# EAGLE board C1 (EAGLE 7.5.0)
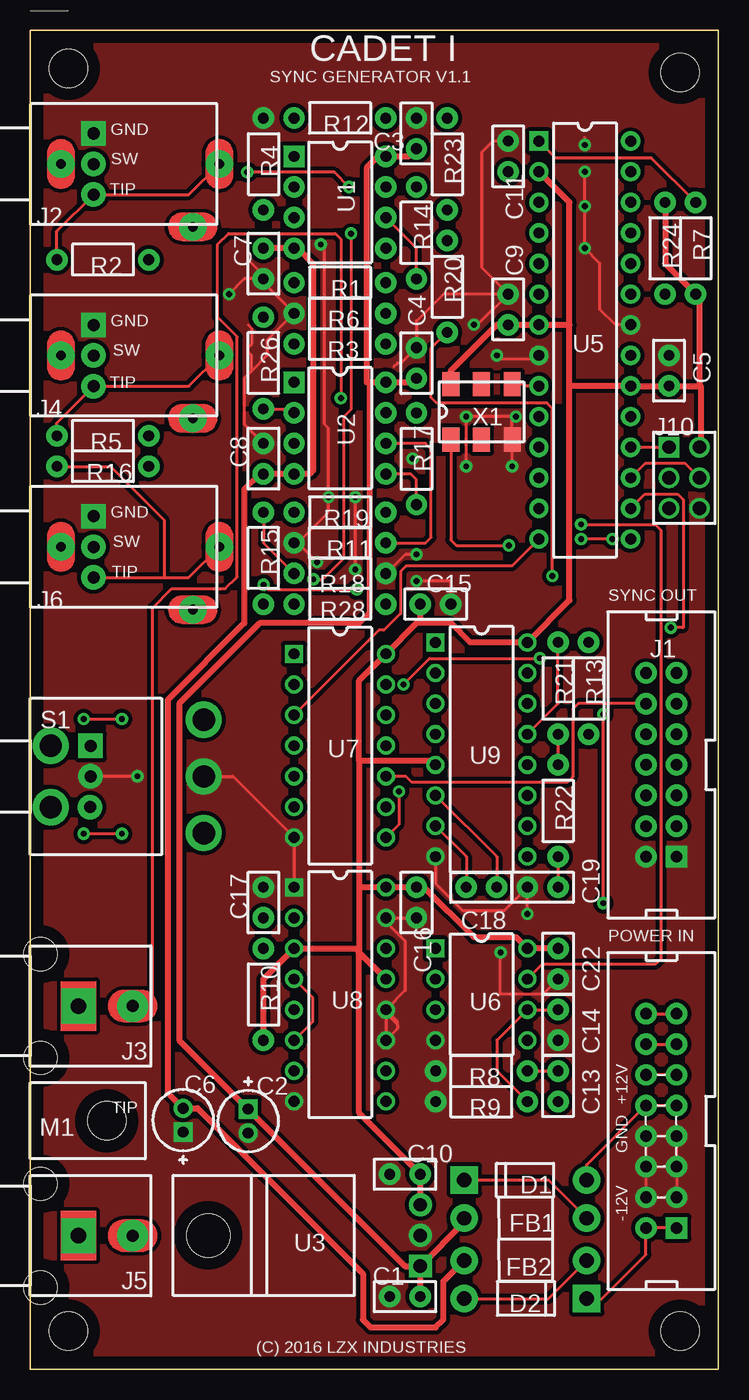
[diagram p0: board, top side]
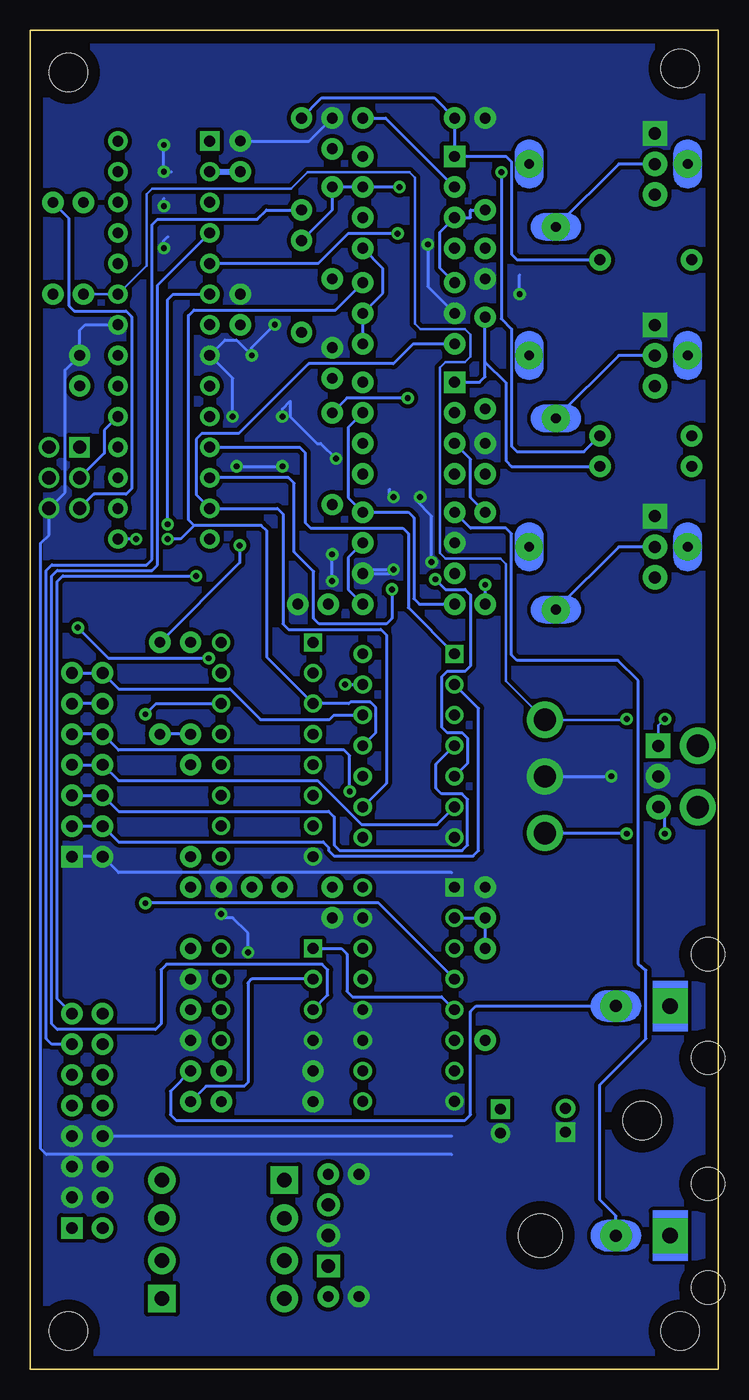
[diagram p1: board, bottom side, seen from below]

Size 57.14 x 111.12 mm. Coordinates in mm from the lower left corner, seen from the top.
Outline: 0,0 57.14,0 57.14,111.12 0,111.12 0,0
Copper layers (1*16): Top 0.035mm / dielectric 1.5mm / Bottom 0.035mm
Design rules "default *": minimum track width 10mil, minimum drill 0.61mm, track to track 8mil, track to pad 8mil, pad to pad 8mil, via to via 8mil, smd to smd 8mil, copper to edge 40mil, drill to drill 8mil, minimum pad ring 0mil, minimum via ring 8mil, stop-mask expansion 2mil, vias tented up to drill 19mil, thermal gap 10mil
Net classes: 1 Power Rails: width 0.508 mm, clearance 0.203 mm, clearance 0.203 mm to class 0
Holes 3.17 mm at 3.17,3.17 3.17,107.95 53.96,3.17 53.96,107.62

## Footprints (pad centres in the part's own frame; a part is rotated, then mirrored left to right if it is on the bottom)
CAP-2.54/6.6x3 = drill 0.889 pad 1.778: 1 -1.27,0; 2 1.27,0
CAPPR-2/5.08 = drill 0.9 pad 1.6 square: 1 -0.991,0 | drill 0.9 pad 1.6: 2 0.991,0
CAP-2.54/6.6x3_C3 = drill 0.889 pad 1.778: 1 -1.27,0; 2 1.27,0
CAP-2.54/6.6x3_C4 = drill 0.889 pad 1.778: 1 -1.27,0; 2 1.27,0
CAP-2.54/6.6x3_C5 = drill 0.889 pad 1.778: 1 -1.27,0; 2 1.27,0
CAPPR-2/5.08_C6 = drill 0.9 pad 1.6 square: 1 -0.991,0 | drill 0.9 pad 1.6: 2 0.991,0
CAP-2.54/6.6x3_C7 = drill 0.889 pad 1.778: 1 -1.27,0; 2 1.27,0
CAP-2.54/6.6x3_C8 = drill 0.889 pad 1.778: 1 -1.27,0; 2 1.27,0
CAP-2.54/6.6x3_C9 = drill 0.889 pad 1.778: 1 -1.27,0; 2 1.27,0
CAP-2.54/6.6x3_C10 = drill 0.889 pad 1.778: 1 -1.27,0; 2 1.27,0
CAP-2.54/6.6x3_C11 = drill 0.889 pad 1.778: 1 -1.27,0; 2 1.27,0
CAP-2.54/6.6x3_C13 = drill 0.889 pad 1.778: 1 -1.27,0; 2 1.27,0
CAP-2.54/6.6x3_C14 = drill 0.889 pad 1.778: 1 -1.27,0; 2 1.27,0
CAP-2.54/6.6x3_C16 = drill 0.889 pad 1.778: 1 -1.27,0; 2 1.27,0
CAP-2.54/6.6x3_C17 = drill 0.889 pad 1.778: 1 -1.27,0; 2 1.27,0
CAP-2.54/6.6x3_C18 = drill 0.889 pad 1.778: 1 -1.27,0; 2 1.27,0
CAP-2.54/6.6x3_C19 = drill 0.889 pad 1.778: 1 -1.27,0; 2 1.27,0
DO-41 = drill 1.2 pad 2.286 square: 1 -5.08,0 | drill 1.2 pad 2.286: 2 5.08,0
DO-41_D2 = drill 1.2 pad 2.286 square: 1 -5.08,0 | drill 1.2 pad 2.286: 2 5.08,0
FB-10.16/4.45x3.5 = drill 1.194 pad 2.286: 1 -5.08,0; 2 5.08,0
IDC14M = drill 0.965 pad 1.778 square: 1 7.62,1.27 | drill 0.965 pad 1.778: 2 7.62,-1.27; 3 5.08,1.27; 4 5.08,-1.27; 5 2.54,1.27; 6 2.54,-1.27; 7 0,1.27; 8 0,-1.27; 9 -2.54,1.27; 10 -2.54,-1.27; 11 -5.08,1.27; 12 -5.08,-1.27; 13 -7.62,1.27; 14 -7.62,-1.27
PJ302M = drill 0.8 pad 2.286: 1A 2.54,0; 2A 13.487,-5.207; 3A 15.697,0 | drill 1 pad 2.032 square: 1B 5.258,2.54 | drill 1 pad 2.032: 2B 5.258,0; 3B 5.258,-2.54
RCJ-04X = drill 1.3 pad 2.9 square: 1 0,4 | drill 1 pad 2.6: 2 0,8.5 | hole 2.75: 4.3,0.85; -4.3,0.85
IDC16M = drill 0.965 pad 1.778 square: 1 8.89,1.27 | drill 0.965 pad 1.778: 2 8.89,-1.27; 3 6.35,1.27; 4 6.35,-1.27; 5 3.81,1.27; 6 3.81,-1.27; 7 1.27,1.27; 8 1.27,-1.27; 9 -1.27,1.27; 10 -1.27,-1.27; 11 -3.81,1.27; 12 -3.81,-1.27; 13 -6.35,1.27; 14 -6.35,-1.27; 15 -8.89,1.27; 16 -8.89,-1.27
HDR-2x3T/2.54x2.54/8x5 = drill 1.1 pad 1.7 square: 1 -2.54,-1.27 | drill 1.1 pad 1.7: 2 -2.54,1.27; 3 0,-1.27; 4 0,1.27; 5 2.54,-1.27; 6 2.54,1.27
KEYSTONE621 = hole 3.175: 0,6.35
RES-7.62/5.1x2.5 = drill 0.889 pad 1.778: 1 -3.81,0; 2 3.81,0
RES-7.62/5.1x2.5_R3 = drill 0.889 pad 1.778: 1 -3.81,0; 2 3.81,0
10TF230-DIY = drill 1.85 pad 3: 1 -4.7,14.4; 2 0,14.4; 3 4.7,14.4; A -2.55,1.7; B 2.55,1.7 | drill 1 pad 2.032 square: 1B -2.54,5 | drill 1 pad 2.032: 2B 0,5; 3B 2.54,4.964
DIP-8 = drill 0.9 pad 1.778 square: 1 -3.81,3.81 | drill 0.9 pad 1.778: 2 -3.81,1.27; 3 -3.81,-1.27; 4 -3.81,-3.81; 5 3.81,-3.81; 6 3.81,-1.27; 7 3.81,1.27; 8 3.81,3.81
TO-220H = drill 1.1 pad 1.9 square: 1 -2.54,0 | drill 1.1 pad 1.9: 2 0,0; 3 2.54,0 | hole 3.6: 0,17.6
DIP-28 = drill 0.9 pad 1.6 square: 1 -3.81,16.51 | drill 0.9 pad 1.6: 2 -3.81,13.97; 3 -3.81,11.43; 4 -3.81,8.89; 5 -3.81,6.35; 6 -3.81,3.81; 7 -3.81,1.27; 8 -3.81,-1.27; 9 -3.81,-3.81; 10 -3.81,-6.35; 11 -3.81,-8.89; 12 -3.81,-11.43; 13 -3.81,-13.97; 14 -3.81,-16.51; 15 3.81,-16.51; 16 3.81,-13.97; 17 3.81,-11.43; 18 3.81,-8.89; 19 3.81,-6.35; 20 3.81,-3.81; 21 3.81,-1.27; 22 3.81,1.27; 23 3.81,3.81; 24 3.81,6.35; 25 3.81,8.89; 26 3.81,11.43; 27 3.81,13.97; 28 3.81,16.51
DIP-8_U6 = drill 0.9 pad 1.5 square: 1 -3.81,3.81 | drill 0.9 pad 1.5: 2 -3.81,1.27; 3 -3.81,-1.27; 4 -3.81,-3.81; 5 3.81,-3.81; 6 3.81,-1.27; 7 3.81,1.27; 8 3.81,3.81
DIP-14 = drill 0.9 pad 1.5 square: 1 -3.81,7.62 | drill 0.9 pad 1.5: 2 -3.81,5.08; 3 -3.81,2.54; 4 -3.81,0; 5 -3.81,-2.54; 6 -3.81,-5.08; 7 -3.81,-7.62; 8 3.81,-7.62; 9 3.81,-5.08; 10 3.81,-2.54; 11 3.81,0; 12 3.81,2.54; 13 3.81,5.08; 14 3.81,7.62
DIP-16 = drill 0.9 pad 1.5 square: 1 -3.81,8.89 | drill 0.9 pad 1.5: 2 -3.81,6.35; 3 -3.81,3.81; 4 -3.81,1.27; 5 -3.81,-1.27; 6 -3.81,-3.81; 7 -3.81,-6.35; 8 -3.81,-8.89; 9 3.81,-8.89; 10 3.81,-6.35; 11 3.81,-3.81; 12 3.81,-1.27; 13 3.81,1.27; 14 3.81,3.81; 15 3.81,6.35; 16 3.81,8.89
CSX-750V = smd 1.4 x 2: 1 -2.54,-2.3; 2 0,-2.3; 3 2.54,-2.3; 4 2.54,2.3; 5 0,2.3; 6 -2.54,2.3

## Placement (x,y rotation side)
C1  330n  [CAP-2.54/6.6x3]  31.11,6.03 180 top
C2  10u 25V  [CAPPR-2/5.08]  18.1,20.6 270 top
C3  100n  [CAP-2.54/6.6x3_C3]  32.07,102.55 90 top
C4  100n  [CAP-2.54/6.6x3_C4]  32.07,83.5 90 top
C5  100n  [CAP-2.54/6.6x3_C5]  53.02,82.87 90 top
C6  10u 25V  [CAPPR-2/5.08_C6]  12.7,20.68 90 top
C7  100n  [CAP-2.54/6.6x3_C7]  19.37,91.76 90 top
C8  100n  [CAP-2.54/6.6x3_C8]  19.37,75.56 270 top
C9  100n  [CAP-2.54/6.6x3_C9]  39.69,87.95 90 top
C10  100n  [CAP-2.54/6.6x3_C10]  31.11,16.19 180 top
C11  100n  [CAP-2.54/6.6x3_C11]  39.69,100.65 90 top
C13  100n  [CAP-2.54/6.6x3_C13]  43.81,23.49 270 top
C14  100n  [CAP-2.54/6.6x3_C14]  43.81,28.57 90 top
C15  100n  [CAP-2.54/6.6x3_C7]  33.66,63.5 0 top
C16  100n  [CAP-2.54/6.6x3_C16]  32.07,38.73 270 top
C17  1n  [CAP-2.54/6.6x3_C17]  19.37,38.73 90 top
C18  47p  [CAP-2.54/6.6x3_C18]  37.47,40 180 top
C19  1n  [CAP-2.54/6.6x3_C19]  42.55,40 180 top
C22  100n  [CAP-2.54/6.6x3_C18]  43.81,33.65 270 top
D1  1N4001  [DO-41]  41.12,15.71 0 top
D2  1N4001  [DO-41_D2]  41.12,5.87 180 top
FB1  68R  [FB-10.16/4.45x3.5]  41.12,12.54 180 top
FB2  68R  [FB-10.16/4.45x3.5]  41.12,9.04 180 top
J1  LZXSYNC14  [IDC14M]  52.39,50.16 270 top
J2  3.5MM JACK  [PJ302M]  0.01,100.01 0 top
J3  RCJ-04X  [RCJ-04X]  0.01,30.15 270 top
J4  3.5MM JACK  [PJ302M]  0.01,84.12 0 top
J5  RCJ-04X  [RCJ-04X]  0.01,11.1 270 top
J6  3.5MM JACK  [PJ302M]  0.01,68.25 0 top
J9  2X8 PIN HEADER  [IDC16M]  52.39,20.62 270 top
J10  2X3 PIN HEADER  [HDR-2x3T/2.54x2.54/8x5]  54.29,73.98 270 top
M1  KEYSTONE621  [KEYSTONE621]  0.01,20.62 270 top
R1  3.92K  [RES-7.62/5.1x2.5]  25.72,90.17 180 top
R2  499R  [RES-7.62/5.1x2.5]  6.03,92.07 180 top
R3  3.92K  [RES-7.62/5.1x2.5_R3]  25.72,85.09 0 top
R4  1K  [RES-7.62/5.1x2.5]  19.37,100.01 270 top
R5  499R  [RES-7.62/5.1x2.5]  6.03,77.47 180 top
R6  1K  [RES-7.62/5.1x2.5_R3]  25.72,87.63 0 top
R7  10K  [RES-7.62/5.1x2.5]  55.24,93.03 270 top
R8  75R  [RES-7.62/5.1x2.5_R3]  37.47,24.76 0 top
R9  680K  [RES-7.62/5.1x2.5_R3]  37.47,22.22 0 top
R10  49.9K  [RES-7.62/5.1x2.5]  19.37,31.11 270 top
R11  1K  [RES-7.62/5.1x2.5_R3]  25.72,68.58 0 top
R12  1K  [RES-7.62/5.1x2.5]  25.72,103.82 180 top
R13  0R  [RES-7.62/5.1x2.5]  46.35,56.51 270 top
R14  1K  [RES-7.62/5.1x2.5_R3]  32.07,94.3 90 top
R15  3.92K  [RES-7.62/5.1x2.5_R3]  19.37,67.31 90 top
R16  499R  [RES-7.62/5.1x2.5]  6.03,74.93 180 top
R17  499R  [RES-7.62/5.1x2.5]  32.07,75.56 270 top
R18  1K  [RES-7.62/5.1x2.5]  25.72,66.04 180 top
R19  75R  [RES-7.62/5.1x2.5]  25.72,71.12 180 top
R20  499R  [RES-7.62/5.1x2.5]  34.61,89.85 270 top
R21  10K  [RES-7.62/5.1x2.5]  43.81,56.51 270 top
R22  10K  [RES-7.62/5.1x2.5]  43.81,46.35 270 top
R23  499R  [RES-7.62/5.1x2.5]  34.61,100.01 270 top
R24  10K  [RES-7.62/5.1x2.5]  52.7,93.03 270 top
R26  1K  [RES-7.62/5.1x2.5_R3]  19.37,83.5 90 top
R28  1K  [RES-7.62/5.1x2.5]  25.72,63.5 180 top
S1  10TF230-DIY  [10TF230-DIY]  0.01,49.2 270 top
U1  LM6172  [DIP-8]  25.72,96.84 0 top
U2  LM6172  [DIP-8]  25.72,78.1 0 top
U3  7805  [TO-220H]  32.38,11.11 90 top
U5  ATMEGA88  [DIP-28]  46.04,85.41 0 top
U6  LM1881  [DIP-8_U6]  37.47,31.11 0 top
U7  74HC14  [DIP-14]  25.72,51.75 0 top
U8  74HC4538  [DIP-16]  25.72,31.11 0 top
U9  74HC4046  [DIP-16]  37.47,51.43 0 top
X1  CSX750VCB13.500M-UT  [CSX-750V]  37.47,79.45 0 top

## Library data of the parts
C1-C11 C13-C19 C22 D1 D2 J1 J3 J5 J9 M1 R1-R24 R26 R28 S1 X1 = common
FB1 FB2 = common; MANUFACTURER: Fair-Rite
J2 J4 J6 = common; DATASHEET: http://www.thonk.co.uk/shop/pj302m/
J10 = common; DATASHEET: http://datasheets.diptrace.com\con_headers\901310126_sd.pdf; MANUFACTURER: Molex
U1 U2 = common; DATASHEET: http://datasheets.diptrace.com\ti\TL07x.pdf; MANUFACTURER: Texas Instruments
U3 U5 = common; MANUFACTURER: Atmel
U6 U7 = common; MANUFACTURER: National Semiconductor
U8 = common; MANUFACTURER: Motorola
U9 = common; DATASHEET: http://datasheets.diptrace.com\fairchild\MM74HC4046.pdf; MANUFACTURER: Fairchild

## Nets
0V: C1.2 C2.2 C3.2 C4.2 C5.2 C6.1 C7.1 C8.1 C9.2 C10.2 C11.2 C14.1 C15.2 C16.2 C17.2 C19.2 C22.2 J1.1 J1.2 J2.1A J2.1B J3.1 J4.1A J4.1B J5.1 J6.1A J6.1B J9.3 J9.4 J9.5 J9.6 J9.7 J9.8 J10.6 R4.1 R6.1 R8.1 R9.1 R11.1 R18.1 S1.2 S1.2B U3.2 U5.8 U5.22 U6.4 U7.7 U8.1 U8.8 U8.11 U8.12 U8.15 U9.8 X1.3
+5V [Power Rails]: C5.1 C9.1 C10.1 C11.1 C15.1 C16.1 C22.1 J10.2 R7.2 R10.2 R24.1 U3.3 U5.2 U5.7 U5.20 U6.8 U7.14 U8.3 U8.13 U8.16 U9.5 U9.16 X1.6
+12V [Power Rails]: C1.1 C2.1 C3.1 C4.1 FB1.2 U1.8 U2.8 U3.1
-12V [Power Rails]: C6.2 C7.2 C8.2 FB2.2 U1.4 U2.4
ATMEGA88_BLANKING_INV: U5.11 U7.1
ATMEGA88_BURSTGATE_INV: U5.5 U7.5
ATMEGA88_CSYNC_INV: U5.16 U7.13
ATMEGA88_HSYNC_INV: R1.1 U5.15 U7.11 U9.3
ATMEGA88_MISO: J10.1 U5.18
ATMEGA88_MOSI: J10.4 U5.17
ATMEGA88_ODDEVEN: R15.1 U5.12
ATMEGA88_ODDEVEN_INV: U5.14 U7.3
ATMEGA88_RESET: J10.5 R7.1 U5.1
ATMEGA88_SCK: J10.3 U5.19
ATMEGA88_VSYNC_INV: R3.1 U5.13 U7.9
CLOCK_OUT: U5.9 X1.4
HSYNC_BUS_OUT: J9.13 J9.14 R23.2
LM1881_CSYNC: U6.1 U8.5
LM1881_ODDEVEN: U5.6 U6.7
LM1881_VSYNC: U5.4 U6.3
Net_0: J5.2 R19.2
Net_1: D2.2 FB2.1
Net_2: D1.1 FB1.1
Net_3: R14.1 U1.6
Net_4: C13.2 U6.2
Net_5: D2.1 J9.1 J9.2
Net_6: R3.2 R6.2 U1.5
Net_7: J4.3A J4.3B R5.2
Net_8: J2.2A J2.2B
Net_9: R1.2 R4.2 U1.3
Net_10: J9.11 J9.12
Net_11: J2.3A J2.3B R2.2
Net_12: R5.1 R14.2 R20.1 U1.7
Net_14: R11.2 R28.1 U2.6
Net_15: J1.3 J1.4 U7.2
Net_16: J1.5 J1.6 U7.4
Net_19: R15.2 R18.2 U2.3
Net_20: J6.3A J6.3B R16.2
Net_21: R26.1 U2.2
Net_22: R16.1 R26.2 U2.1
Net_24: R17.2 U2.5
Net_27: R19.1 R28.2 U2.7
Net_33: D1.2 J9.9 J9.10
Net_34: C13.1 J3.2 R8.2 R17.1
Net_35: C14.2 R9.2 U6.6
Net_40: U8.4 U8.6 U9.14
Net_41: C17.1 R10.1 U8.2
Net_42: C18.1 U9.6
Net_43: C18.2 U9.7
Net_44: C19.1 R22.2
Net_45: R13.2 R21.2 R22.1
Net_46: R21.1 U9.13
Net_47: J1.7 J1.8 U7.6
Net_48: J1.9 J1.10 U7.8
Net_49: J1.11 J1.12 U7.10
Net_50: J1.13 J1.14 U7.12
Net_52: R12.1 U1.2
Net_53: R2.1 R12.2 R23.1 U1.1
Net_58: R13.1 X1.1
Net_60: J4.2A J4.2B
Net_61: J6.2A J6.2B
Net_62: R24.2 S1.1 S1.1B U5.23
Net_63: S1.3 S1.3B
VSYNC_BUS_OUT: J9.15 J9.16 R20.2

## Tracks (layer width: path | path; a pad name or v marks a point on that pad's centre or on a via)
0V  (via drill 0.49 pad 1.02)
  Top 0.254: J9.6 J9.8 J9.7 J9.5 | J9.6 J9.4 J9.3 J9.5 | J9.6 J9.5 | 42.23,83.82 39.05,83.82 v38.73,84.14 | v36.83,86.68 37.15,86.68 C9.2 | C11.2 38.42,101.92 37.47,100.97 37.47,91.44 C9.2 | C7.1 19.37,90.17 R6.1 | R6.1 | R6.1 19.68,85.41 19.68,84.14 18.38,82.83 | 18.38,82.83 17.78,82.23 17.78,78.42 C8.1 | v23.81,66.99 22.23,68.58 R11.1 21.91,68.26 24.77,71.12 v24.77,72.39 24.77,78.1 24.45,78.42 24.45,93.34 v24.13,93.34 | 40.01,79.06 X1.3 v40.01,74.93 | 40.01,79.06 v36.2,79.06 v36.2,74.93 | v31.75,75.56 32.07,75.25 | 40.01,79.06 v40.32,79.06 | C15.2 34.92,65.4 v32.07,65.4 | v32.07,67.63 31.11,67.63 R18.1 | U8.1 U7.7 16.84,49.2 S1.2 | U9.8 33.66,40.32 35.88,38.1 39.37,38.1 C19.2 v41.27,37.78 | C22.2 42.55,31.11 39.05,31.11 v39.05,34.61 | C16.2 U8.15 29.53,37.15 31.11,35.56 31.11,31.43 U8.12 | U8.12 U8.11 | U8.11 | U8.12 29.53,29.53 30.48,28.57 | 30.48,28.57 30.48,28.89 U8.12 | 30.48,28.57 30.48,28.26 U8.11 | 30.16,83.18 30.48,83.5 30.8,83.5 C4.2 32.07,87 34.29,89.22 C9.2 | R6.1 | 18.38,82.83 18.38,84.17 18.1,84.45 18.1,84.77 18.41,85.09 18.41,86.36 18.1,86.68 | C7.1 19.37,90.8 18.1,92.07 | C7.1 17.78,90.49 v16.51,89.22 | v26.99,66.36 v26.99,72.39 | U5.22 48.58,86.68 47.31,87.95 47.31,91.76 v46.04,93.03 v46.04,96.52 v46.04,99.38 | v46.04,101.6 46.04,102.23 | v8.9,49.21 5.03,49.21 S1.2B
  Bottom 0.254: 22.15,17.83 55.79,17.83 56.25,18.29 56.25,68.56 55.56,69.24 J10.6 54.24,72.76 54.24,82.92 C5.2 53.02,86.22 52.56,86.68 U5.22 | 22.15,41.22 49.8,41.22 J1.2 J1.1 | 22.15,19.35 J9.8 | C11.2 33.97,101.92 C3.2 | v36.83,86.68 38.73,84.77 v38.73,84.14 40.01,85.41 40.96,85.41 U5.8 40.32,82.23 v40.32,79.06 | v23.81,66.99 23.81,70.8 25.08,72.07 v24.77,72.39 | v24.13,93.34 24.13,89.85 R6.1 | v36.2,79.06 36.2,79.69 35.56,80.33 35.56,79.06 33.34,76.83 33.02,76.83 v31.75,75.56 | v40.01,74.93 v36.2,74.93 | v32.07,65.4 v32.07,67.63 | v39.05,34.61 39.05,36.19 40.32,37.46 40.96,37.46 v41.27,37.78 | v16.51,89.22 16.51,90.8 | v26.99,72.39 27.3,72.39 27.3,73.02 | v46.04,93.03 46.04,93.66 45.72,93.98 | v46.04,96.52 46.04,97.16 | 45.4,99.38 v46.04,99.38 v46.04,101.6 | S1.2 v8.9,49.21 | R18.1 29.53,66.36 v26.99,66.36 27.3,66.04 R18.1
  pour Top (isolate 0.33): 0.83,0.82 56.31,0.82 56.31,110.3 0.83,110.3
  pour Bottom (isolate 0.33): 0.83,0.82 56.31,0.82 56.31,110.3 0.83,110.3
+5V
  Top 0.508: C22.1 U6.8 | U6.8 | 32.07,61.91 U7.14 27.3,57.15 27.3,50.48 | 32.07,61.91 32.38,62.23 C15.1 | 32.07,61.91 34.92,61.91 36.51,60.32 U9.16 44.77,63.82 44.77,81.6 | 27.3,34.61 27.3,21.27 C10.1 U3.3 | 27.3,34.61 U8.13 | R10.2 19.37,32.38 U8.3 26.99,34.92 27.3,34.61 | U9.5 33.34,50.48 27.3,50.48 | U6.8 40.32,35.88 36.83,35.88 32.7,40 C16.1 U8.16 27.3,40 | 44.77,81.6 44.77,86.68 | 44.77,86.68 44.77,96.84 U5.2 | R24.1 52.7,91.76 R7.2 55.56,88.9 55.56,81.6 | 55.56,81.6 C5.1 U5.20 44.77,81.6 | 55.56,81.6 55.65,81.6 55.65,76.6 J10.2 | 44.77,86.68 U5.7 C9.1 38.73,86.68 34.92,82.87 X1.6 | 27.3,40 27.3,34.61 | 27.3,50.48 27.3,40
  Bottom 0.508: U5.2 C11.1
+12V
  Top 0.508: C3.1 31.43,100.65 U1.8 28.89,100.65 27.94,99.69 27.94,81.91 28.16,81.91 | 28.16,81.91 U2.8 31.75,81.91 C4.1 | C1.1 U3.1 | FB1.2 36.04,12.23 U3.1 | 28.16,81.91 28.16,62.77 27.3,61.91 19.05,61.91 12.38,55.24 12.38,27.3 C2.1 31.11,8.57 U3.1
-12V
  Top 0.508: C7.2 U1.4 22.23,93.03 23.5,91.76 23.5,74.61 23.18,74.3 U2.4 C8.2 19.05,74.3 17.78,73.02 17.78,61.91 11.43,55.56 11.43,22.94 C6.2 13.89,21.67 27.62,7.94 27.62,4.13 28.26,3.49 33.66,3.49 34.29,4.13 34.29,7.3 FB2.2
ATMEGA88_BLANKING_INV
  Bottom 0.254: U5.11 34.77,76.52 34.31,76.06 34.31,70.26 33.86,69.8 26.2,69.8 25.75,69.34 25.75,63.21 U7.1
ATMEGA88_BURSTGATE_INV  (via drill 0.49 pad 1.02)
  Top 0.254: v23.51,65.56 24.28,65.56 26.04,67.31 26.04,79.06 26.67,79.69 26.67,94.25 v26.63,94.25
  Bottom 0.254: v26.63,94.25 30.75,94.25 33.24,91.76 U5.5 | v23.51,65.56 22.67,64.72 21.04,64.72 20.59,64.26 20.59,58.37 21.04,57.91 22.53,57.91 22.99,57.45 22.99,53.29 22.53,52.83 21.29,52.83 20.83,52.38 20.83,50.29 U7.5
ATMEGA88_CSYNC_INV  (via drill 0.49 pad 1.02)
  Top 0.254: U5.16 51.03,72.62 53.74,72.62 54.2,72.16 54.2,61.54 v53.17,61.54 | v30.99,56.83 33.16,59 v42.31,59
  Bottom 0.254: v42.31,59 50.64,59 v53.17,61.54 | v30.99,56.83 U7.13
ATMEGA88_HSYNC_INV  (via drill 0.49 pad 1.02)
  Top 0.254: v48.34,68.9 v45.73,68.9
  Bottom 0.254: U7.11 28.45,52.83 28.45,54.91 28.9,55.37 30.54,55.37 30.67,55.24 U9.3 37.49,59.08 37.49,69.57 37.95,70.03 43.53,70.03 | 43.53,70.03 43.99,70.48 43.99,87.44 43.53,87.9 31.8,87.9 R1.1 | v48.34,68.9 U5.15 | 43.53,70.03 44.66,68.9 v45.73,68.9
ATMEGA88_MISO
  Top 0.254: U5.18 50.98,76.52 | 50.98,76.52 | 50.98,76.52 J10.1
ATMEGA88_MOSI
  Top 0.254: J10.4 54.38,75.16 51.03,75.16 U5.17
ATMEGA88_ODDEVEN  (via drill 0.49 pad 1.02)
  Top 0.254: v19.37,65.1 19.75,64.72 v27.11,64.72
  Bottom 0.254: v27.11,64.72 27.11,62.32 27.57,61.86 33.15,61.86 33.6,62.32 33.6,66.21 35.23,67.84 35.23,73.52 35.69,73.98 U5.12 | v19.37,65.1 R15.1
ATMEGA88_ODDEVEN_INV
  Top 0.254: U5.14 40,66.67 31.2,66.67 30.75,66.21 30.75,62.71 29.36,61.33 28.94,61.33 U7.3
ATMEGA88_RESET
  Top 0.254: R7.1 51.58,100.51 43.64,100.51 U5.1
  Bottom 0.254: R7.1 53.92,95.52 53.92,88.26 53.47,87.81 49.17,87.81 48.72,87.35 48.72,73.07 49.17,72.62 51.84,72.62 J10.5
ATMEGA88_SCK
  Bottom 0.254: U5.19 50.98,77.93 50.98,76.02 J10.3
ATMEGA88_VSYNC_INV
  Bottom 0.254: R3.1 25.36,85.09 26.99,83.45 34.02,83.45 39.83,77.65 42.9,77.65 43.36,77.19 43.36,72.57 U5.13 36.6,71.44 36.14,70.98 36.14,61.86 35.69,61.41 28.02,61.41 27.57,60.95 27.57,48.63 U7.9
CLOCK_OUT
  Top 0.254: U5.9 41.03,81.6 41.03,81.75 X1.4
HSYNC_BUS_OUT
  Top 0.254: J9.14 J9.13
  Bottom 0.254: J9.13 55.33,26.97 55.79,27.43 55.79,66.29 55.33,66.74 47.48,66.74 47.03,67.2 47.03,94.97 46.57,95.43 38.29,95.43 37.51,96.2 R23.2
LM1881_CSYNC
  Bottom 0.254: U6.1 31.31,34.92 30.85,34.47 30.85,31.38 30.39,30.92 22.99,30.92 U8.5
LM1881_ODDEVEN  (via drill 0.49 pad 1.02)
  Top 0.254: v45.73,70.12 51.88,70.12 52.34,69.66 52.34,34.06 51.88,33.6 42.49,33.6 U6.7
  Bottom 0.254: v45.73,70.12 45.73,88.76 45.28,89.22 U5.6
LM1881_VSYNC
  Bottom 0.254: U6.3 32.44,31.06 32.44,33.15 32.89,33.6 45.82,33.6 46.28,33.15 46.28,28.65 46.74,28.19 54.88,28.19 55.33,28.65 55.33,65.83 54.88,66.29 47.03,66.29 46.57,66.74 46.57,89.95 U5.4
Net_0
  Bottom 0.254: J5.2 8.51,12.73 9.87,14.09 9.87,23.59 6.03,27.43 6.03,33.11 6.67,33.66 6.67,57.15 8.35,58.84 16.73,58.84 17.18,59.29 17.18,69.34 17.64,69.8 20.59,69.8 R19.2
Net_1
  Top 0.254: D2.2 43.02,5.87 FB2.1
Net_2
  Top 0.254: D1.1 43.02,15.71 FB1.1
Net_3
  Top 0.254: R14.1 32.07,93.03 U1.6
Net_4
  Bottom 0.254: U6.2 38.73,32.38 39.05,32.07 39.05,23.81 39.37,23.49 42.55,23.49 C13.2
Net_5
  Top 0.254: J9.1 J9.2 51.12,9.52 47.46,5.87 D2.1
Net_6
  Bottom 0.254: R3.2 R6.2 27.85,89.31 27.85,91.35 U1.5
Net_7
  Top 0.254: R5.2 2.22,78.54 J4.3B 13.17,81.58 J4.3A
Net_8
  Bottom 0.254: J2.2B 8.29,100.01 J2.2A
Net_9
  Bottom 0.254: R1.2 23.13,91.39 23.13,94.35 U1.3 20.59,95.57 20.59,96.2 R4.2
Net_10
  Top 0.254: J9.11 J9.12
Net_11
  Top 0.254: R2.2 2.22,94.42 J2.3B 13.17,97.47 J2.3A
Net_12  (via drill 0.49 pad 1.02)
  Top 0.254: v26.47,98.11 25.25,99.33 v18.02,99.33
  Bottom 0.254: v26.47,98.11 U1.7 R14.2 32.07,96.2 R20.1 | v18.02,99.33 18.02,87.17 17.18,86.33 17.18,76.61 16.73,76.15 11.16,76.15 R5.1
Net_14
  Top 0.254: R11.2 32.83,68.58 33.29,69.04 33.29,76.38 32.83,76.83 U2.6
  Bottom 0.254: R11.2 30.75,67.36 30.75,64.72 R28.1
Net_15
  Bottom 0.254: J1.3 J1.4 49.8,43.76 32.82,43.76 32.36,43.31 32.36,43.05 31.9,42.59 20.37,42.59 19.91,43.05 19.91,54.84 U7.2
Net_16
  Bottom 0.254: J1.5 J1.6 49.8,46.3 32.36,46.3 31.9,45.85 31.9,43.51 31.45,43.05 21.29,43.05 20.83,43.51 20.83,47.3 21.29,47.75 22.99,47.75 23.45,48.21 23.45,50.21 U7.4
Net_19
  Top 0.254: R15.2 19.37,68.58 R18.2
  Bottom 0.254: R15.2 20.59,72.34 20.59,75.51 U2.3
Net_20
  Top 0.254: J6.3B 11.11,65.71 | 11.11,65.71 13.17,65.71 J6.3A | R16.2 6.67,74.93 11.11,70.48 11.11,65.71
Net_21
  Top 0.254: R26.1 21.59,79.69 U2.2
Net_22
  Bottom 0.254: U2.1 19.82,81.91 19.37,82.37 19.37,83.59 | 19.37,83.59 17.64,81.86 17.64,75.39 17.18,74.93 R16.1 | 19.37,83.59 R26.2
Net_24
  Top 0.254: R17.2 32.07,73.84 31.61,74.3 U2.5
Net_27
  Bottom 0.254: U2.7 30.75,78.16 30.75,72.34 R19.1 25.75,71.12 25.29,70.66 25.29,63.96 24.83,63.5 R28.2
Net_33
  Top 0.254: D1.2 46.2,16.98 J9.10 J9.9
Net_34  (via drill 0.49 pad 1.02)
  Top 0.254: R8.2 C13.1 | C13.1 | J3.2 10.16,30.15 10.16,63.18 11.75,64.77 16.19,64.77 17.18,65.76 17.18,85.69 15.56,87.31 15.56,93.34 16.46,94.25 25.34,94.25 25.79,93.79 v25.79,80.59
  Bottom 0.254: C13.1 45.49,23.09 45.49,21.13 45.03,20.67 21.04,20.67 20.59,21.13 20.59,29.69 20.13,30.15 J3.2 | v25.79,80.59 30.85,80.59 R17.1
Net_35
  Top 0.254: C14.2 U6.6 38.73,27.3 38.73,24.76 R9.2 | C14.2
Net_40  (via drill 0.49 pad 1.02)
  Top 0.254: v47.57,38.68 v47.57,54.36 | U8.4 23.45,30.85 23.45,28.84 U8.6
  Bottom 0.254: v47.57,54.36 46.69,55.24 U9.14 | U8.4 28.21,38.68 v47.57,38.68
Net_41
  Bottom 0.254: U8.2 C17.1 R10.1
Net_42
  Top 0.254: U9.6 38.73,42.54 C18.1
Net_43
  Top 0.254: U9.7 36.2,42.54 C18.2
Net_44
  Top 0.254: R22.2 C19.1
Net_45
  Top 0.254: R21.2 R22.1
  Bottom 0.254: R21.2 R13.2
Net_46
  Top 0.254: U9.13 43.81,55.24 R21.1
Net_47
  Bottom 0.254: J1.7 J1.8 49.8,48.84 33.26,48.84 29.63,45.21 23.37,45.21 U7.6
Net_48  (via drill 0.49 pad 1.02)
  Top 0.254: v30.61,47.94 30.61,45.21 U7.8
  Bottom 0.254: v30.61,47.94 30.61,50.93 31.07,51.38 49.8,51.38 J1.10 J1.9
Net_49
  Top 0.254: J1.12 45.49,55.24 45.03,54.79 45.03,49.16 44.58,48.7 31.7,48.7 31.19,49.21 U7.10
  Bottom 0.254: J1.12 J1.11
Net_50
  Bottom 0.254: J1.13 J1.14 49.8,56.46 40.55,56.46 38.01,53.92 32.29,53.92 31.92,54.29 U7.12
Net_52
  Bottom 0.254: R12.1 27.62,103.82 U1.2
Net_53
  Bottom 0.254: R23.1 32.93,105.5 23.58,105.5 R12.2 U1.1 17.64,100.65 17.18,100.19 17.18,92.53 16.73,92.07 R2.1
Net_58  (via drill 0.49 pad 1.02)
  Top 0.254: X1.1 34.92,68.83 35.38,68.37 v39.74,68.37
  Bottom 0.254: v39.74,68.37 39.74,66.94 R13.1
Net_60
  Bottom 0.254: J4.2B 8.29,84.12 J4.2A
Net_61
  Bottom 0.254: J6.2B 8.29,68.25 J6.2A
Net_62  (via drill 0.49 pad 1.02)
  Top 0.254: v4.45,53.97 v7.62,53.97 | v7.62,53.97
  Bottom 0.203: R24.2 U5.23 47.48,91.58 47.48,97.51 47.03,97.97 35.46,97.97 34.1,99.33 25.63,99.33 25.18,98.87 25.18,86.77 24.72,86.31 21.04,86.31 20.59,85.85 20.59,84.05 21.04,83.59 22.67,83.59 23.13,83.13 23.13,67.72 22.67,67.26 18.1,67.26 17.64,66.8 17.64,57.13 S1.1 7.62,53.9 v7.62,53.97 | v4.45,53.97 5.01,53.41 S1.1B
Net_63  (via drill 0.49 pad 1.02)
  Top 0.254: v4.45,44.45 v7.62,44.45 | v7.62,44.45
  Bottom 0.254: v7.62,44.45 14.41,44.45 S1.3 | v4.45,44.45 4.45,46.66 S1.3B
VSYNC_BUS_OUT  (via drill 0.49 pad 1.02)
  Top 0.254: J9.16 J9.15 | v43.36,65.83 43.36,79.73 42.9,80.19 33.74,80.19 33.29,80.64 33.29,84.72 R20.2
  Bottom 0.254: J9.15 54.88,30.73 54.88,65.37 54.42,65.83 v43.36,65.83

## Text on the board
tPlace: CADET I | SYNC GENERATOR V1.1 | GND | R12 | C3 | SW | TIP | R4 | R23 | U1 | C11 | J2 | R14 | C7 | R24 | R7 | R2 | C9 | R1 | R20 | GND | R6 | C4 | SW | U5 | R3 | TIP | R26 | C5 | J4 | X1 | J10 | R5 | U2 | C8 | R17 | R16 | GND | SW | R19 | R11 | TIP | R15 | R18 | C15 | SYNC OUT | J6 | R28 | J1 | R21 | R13 | S1 | U7 | U9 | R22 | C19 | C17 | C18 | POWER IN | C16 | C22 | R10 | U8 | U6 | C14 | J3 | R8 | TIP | C6 | C2 | C13 | +12V | R9 | M1 | C10 | GND | D1 | -12V | FB1 | U3 | FB2 | J5 | C1 | D2 | (C) 2016 LZX INDUSTRIES
tDocu: R12 | C3 | R4 | R23 | U1 | C11 | J2 | R14 | C7 | R24 | R7 | R2 | C9 | R1 | R20 | R6 | C4 | U5 | R3 | R26 | C5 | J4 | X1 | J10 | R5 | U2 | C8 | R17 | R16 | R19 | R11 | R15 | R18 | C15 | J6 | R28 | J1 | R21 | R13 | S1 | U7 | U9 | R22 | C19 | C17 | C18 | C16 | C22 | R10 | U8 | U6 | C14 | J3 | R8 | C6 | C2 | C13 | R9 | M1 | C10 | D1 | FB1 | U3 | FB2 | J5 | C1 | D2